# Altium PCB CT310高端控制盒核心板电路V1.3.PcbDoc (part 3 of 10)
Units mil, origin at the board's own origin, x right, y up, seen from the top; angles counter-clockwise.
Board outline 3735.76 x 4625 mil, 2 copper layers (TOP, BOTTOM), stack 10.4 mil thick; 198 components, 362 nets, 1085 pads, 352 vias.
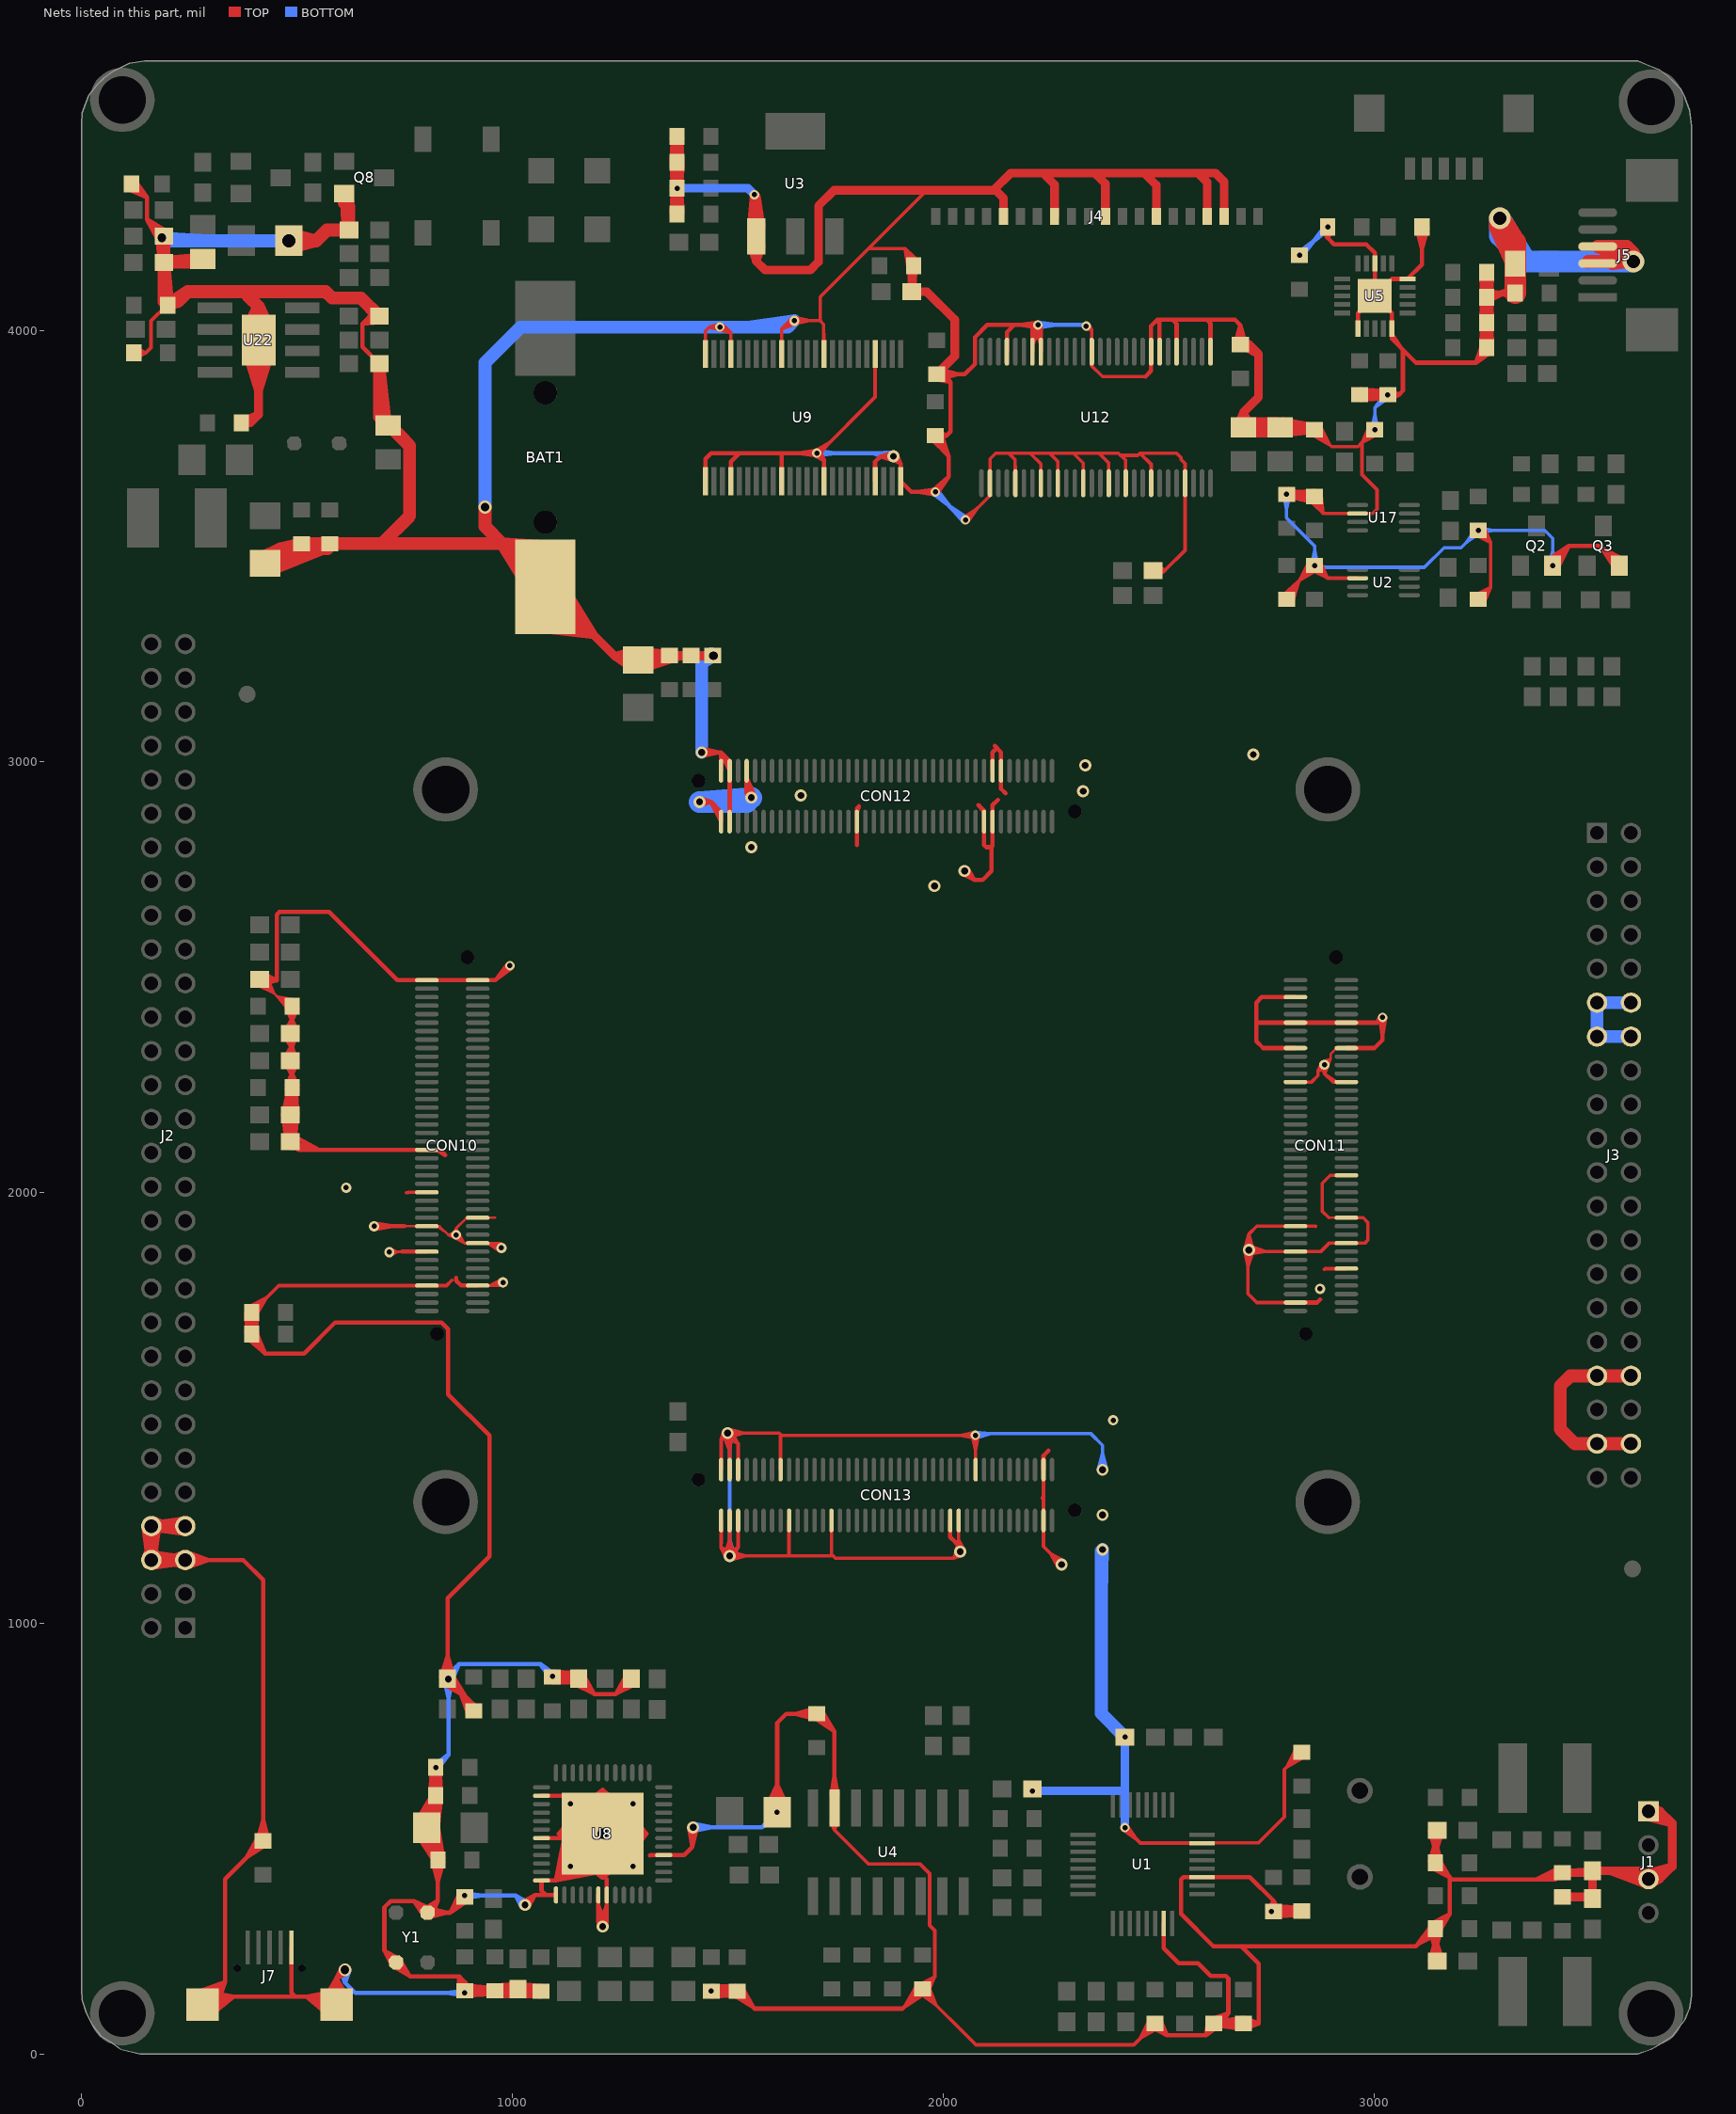
[diagram p3: the nets of this part, all layers, seen from the top]

## Via types
v1: diameter 22, hole 12, TOP to BOTTOM, tented both sides, 177 vias
v2: diameter 22, hole 12, TOP to BOTTOM, 89 vias
v3: diameter 28, hole 16, TOP to BOTTOM, 37 vias
v4: diameter 30, hole 20, TOP to BOTTOM, tented both sides, 26 vias
v5: diameter 24, hole 12, TOP to BOTTOM, 17 vias
v6: diameter 50, hole 30, TOP to BOTTOM, tented both sides, 5 vias
v7: diameter 40, hole 24, TOP to BOTTOM, 1 vias

## Nets (pads, with @x,y where several pads share a name; then routed paths per layer and width w, separated by ;. In a path a pad name is that pad's centre, name@x,y a point inside that pad or via, vN(x,y) a via of type N, cw(c..) or ccw(c..) an arc to the next point about the centre after c; other vN are vias at no path point) (continued)
GND: BAT1.2 C1.2 C2.2 C3.2 C6.1 C7.1 C8.1 C11.2 C13.2 C16.1 C17.2 C18.2 C20.2 C21.2 C22.2 C23.1 C24.2 C25.2 C26.2 C27.2 C28.1 C29.1 C30.2 C31.2 C32.2 C33.2 C34.2 C35.1 C36.2 C37.2 C38.2 C39.2 C40.2 C41.1 C42.1 C43.1 C44.1 C45.1 C46.1 C47.1 C48.1 C49.1 C50.1 C51.1 C52.1 C53.1 C54.1 C55.1 C56.2 C57.2 C58.2 C59.2 C60.2 C61.2 C62.2 C79.2 C80.2 C87.2 C88.2 C89.1 C93.2 C95.2 C96.2 C112.2 C117.2 C118.2 C128.2 C129.2 C130.2 C148.2 C149.2 C150.2 C154.2 CON10.7 CON10.8 CON10.15 CON10.18 CON10.21 CON10.24 CON10.29 CON10.39 CON10.79 CON10.80 CON11.6 CON11.11 CON11.12 CON11.17 CON11.18 CON11.25 CON11.26 CON11.47 CON11.57 CON11.60 CON11.63 CON11.66 CON11.69 CON11.78 CON12.14 CON12.15 CON12.16 CON12.17 CON12.47 CON12.74 CON12.77 CON12.78 CON12.79 CON12.80 CON13.3 CON13.4 CON13.20 CON13.23 CON13.25 CON13.53 CON13.63 CON13.66 CON13.75 CON13.76 CON13.77 CON13.78 CON13.79 CON13.80 D3.2 J1.1 J1.3 J2.5 J2.6 J2.7 J2.8 J3.11 J3.12 J3.13 J3.14 J3.33 J3.34 J3.37 J3.38 J4.3 J4.4 J4.7 J4.10 J4.13 J4.16 J5.3 J5.4 J7.5 J7.6 J7.7 Q2.2 Q3.2 Q8.2 R4.1 R5.1 R11.2 R12.2 R14.1 R15.1 R26.1 R29.1 R32.2 R33.2 R42.1 R43.2 R44.1 R45.2 R89.2 R119.1 R120.1 R128.1 R129.1 R133.2 R135.2 R174.1 U1.3 U1.7 U1.31 U2.2 U3.1 U4.15 U5.6 U5.10 U5.15 U5.18 U5.21 U8.1 U8.6 U8.7 U8.16 U8.38 U8.43 U8.48 U8.49 U9.4 U9.10 U9.15 U9.21 U9.24 U9.25 U9.28 U9.34 U9.39 U9.45 U9.48 U12.2 U12.5 U12.8 U12.10 U12.13 U12.16 U12.18 U12.21 U12.25 U12.29 U12.33 U12.35 U12.36 U12.43 U12.49 U12.50 U12.53 U17.2 U22.9 Y1.2 Y1.4 | length 157005.7
  TOP w6: R174.1@405.35,2480.64 445.59,2461.73 ; R174.1@408.3,2485.94 445.59,2461.73 ; R174.1@411.91,2490.76 445.59,2461.73 ; R174.1@415.15,2494.14 445.59,2461.73 ; R174.1@415.69,2491.63 476.11,2431.21 C87.2@487.98,2431.21 C88.2@487.98,2242.43 ; R174.1@418.73,2497.17 445.59,2461.73 ; R174.1@423.76,2500.47 445.59,2461.73 ; R174.1@429.24,2503.08 445.59,2461.73 ; R119.1@468.23,2310.66 487.98,2343.32 ; R120.1@468.23,2362.98 487.98,2330.32 ; R119.1@469.95,2300.85 487.98,2267.49 ; R120.1@469.95,2372.8 487.98,2406.16 ; C88.2@473.58,2247.43 487.98,2280.11 ; C87.2@473.58,2426.21 487.98,2393.53 ; R119.1@473.68,2307.94 487.98,2343.32 ; R120.1@473.68,2365.71 487.98,2330.32 ; R119.1@475.53,2303.3 487.98,2267.49 ; R120.1@475.53,2370.34 487.98,2406.16 ; C87.2@478.21,2422.18 452.13,2455.2 ; C88.2@479.33,2245.46 487.98,2280.11 ; C87.2@479.33,2428.18 487.98,2393.53 ; R119.1@479.43,2306.13 487.98,2343.32 ; R120.1@479.43,2367.52 487.98,2330.32 ; R119.1@481.36,2304.83 487.98,2267.49 ; R120.1@481.36,2368.82 487.98,2406.16 ; C87.2@482.68,2426.27 452.13,2455.2 ; R119.1@484.05,2305.36 487.98,2343.32 ; R120.1@484.05,2368.29 487.98,2330.32 ; R119.1@486.02,2305.36 487.98,2267.49 ; R120.1@486.02,2368.29 487.98,2406.16 ; C88.2@487.98,2244.4 487.98,2280.11 ; C87.2@487.98,2429.25 487.98,2393.53 ; C87.2@487.98,2433.18 452.13,2455.2 ; R119.1@488.73,2305.16 487.98,2343.32 ; R120.1@488.73,2368.48 487.98,2330.32 ; R119.1@490.7,2305.31 487.98,2267.49 ; R120.1@490.7,2368.33 487.98,2406.16 ; C87.2@491.75,2441.04 452.13,2455.2 ; C87.2@493.37,2446.88 452.13,2455.2 ; R119.1@494.72,2305.75 487.98,2343.32 ; R120.1@494.72,2367.89 487.98,2330.32 ; C88.2@496.64,2245.46 487.98,2280.11 ; R119.1@496.66,2304.4 487.98,2267.49 ; R120.1@496.66,2369.24 487.98,2406.16 ; C87.2@496.64,2428.18 487.98,2393.53 ; R119.1@500.62,2307.3 487.98,2343.32 ; R120.1@500.62,2366.34 487.98,2330.32 ; C88.2@502.38,2247.43 487.98,2280.11 ; C87.2@502.38,2426.21 487.98,2393.53 ; R119.1@502.46,2302.54 487.98,2267.49 ; R120.1@502.46,2371.11 487.98,2406.16 ; v5(713.61,1860.81) 733.61,1860.81 ; v5@715.64,1852.04 733.61,1860.81 ; v5@715.64,1869.57 733.61,1860.81 ; 743.61,1861.83 734.64,1861.83 733.61,1860.81 ; 748.61,1920.57 748.92,1920.88 CON10.21@800.66,1920.88 829.88,1920.88 ; 755.16,1920.88 CON10.21@778.16,1920.88 ; 841.97,1908.79 CON10.21@823.16,1920.88 ; v2@860.89,1902.67 868.61,1915.85 ; v2@863.86,1894.14 887.67,1881.51 ; v2@866.88,1892.76 850.19,1900.57 ; v2@866.88,1908.38 850.19,1900.57 ; v2@875.05,1905.33 887.67,1881.51 ; v2@876.33,1902.67 868.61,1915.85 ; CON10.18@896.27,1881.51 887.67,1881.51 ; CON10.8@918.77,1783.1 976.14,1783.1 977.61,1784.57 v5(977.61,1790.57) CON10.8@946.05,1783.1 ; CON10.8@941.27,1783.1 964.27,1783.1 ; CON10.18@941.27,1881.51 964.27,1881.51 ; CON10.24@941.27,1940.58 955.27,1940.58 CON10.24@918.77,1940.58 893.34,1940.58 868.61,1915.85 ; 955.28,1940.57 958.61,1940.57 ; v5@969.58,1862.53 CON10.18@941.78,1881.51 ; v5@969.69,1862.47 CON10.18@940.7,1881.51 ; v5@974.34,1798.96 CON10.8@946.05,1783.1 ; v5@975.32,1879.41 CON10.18@940.7,1881.51 ; v5@975.38,1879.4 CON10.18@941.78,1881.51 ; v5@978.45,1781.61 CON10.8@946.05,1783.1 ; v5@2878.81,2303.18 2898.02,2309.98 ; v5(2883.61,2295.57) 2898.02,2309.98 ; v5@2891.23,2290.77 2898.02,2309.98 ; CON11.57@2912.02,1940.58 2893.62,1940.58 CON11.57@2934.52,1940.58 ; CON11.17@2912.02,2334.28 2898.02,2320.38 ; CON11.17@2934.52,2334.28 2911.92,2334.28 2898.02,2320.38 ; CON10.21@823.16,1920.88 829.88,1920.88 ; CON10.21@823.16,1920.88 829.88,1920.88 ; 829.88,1920.88 850.19,1900.57 ; 850.19,1900.57 v2(868.61,1900.57) ; v2(868.61,1900.57) 887.67,1881.51 ; v2(868.61,1900.57) 868.61,1915.85 ; 887.67,1881.51 CON10.18@918.77,1881.51 972.67,1881.51 973.61,1880.57 v5(973.61,1870.57) ; CON10.18@940.7,1881.51 v5(973.61,1870.57) ; CON10.18@941.78,1881.51 v5(973.61,1870.57) ; 2898.02,2309.98 2898.02,2320.38
  TOP w8: C96.2@120.82,3947.85 148.61,3947.85 ; C96.2@121.41,3942.17 148.61,3947.85 ; C96.2@121.41,3953.54 148.61,3947.85 ; C96.2@124.2,3934.56 148.61,3947.85 ; C96.2@124.2,3961.15 148.61,3947.85 ; C95.2@208.5,4066.79 C95.2@199.56,4057.85 196.56,4057.85 160.76,4022.06 160.76,3960 148.61,3947.85 ; C117.2@380.54,1718.03 C112.2@389.11,1677.03 ; C117.2@380.65,1720.46 C112.2@381.73,1677.76 ; C112.2@380.71,1674.79 C117.2@394.24,1714.26 ; C117.2@381.09,1714.71 C112.2@399.38,1677.03 ; C117.2@381.94,1712.53 C112.2@406.76,1677.76 ; C117.2@386.36,1733.77 428.93,1755.26 ; C112.2@388.54,1672.93 C117.2@394.24,1714.26 ; C117.2@388.54,1718.91 C112.2@389.11,1677.03 ; C117.2@388.63,1717.52 C112.2@399.38,1677.03 ; C117.2@388.68,1719.91 C112.2@381.73,1677.76 ; C117.2@388.9,1716.57 C112.2@406.76,1677.76 ; C117.2@390.58,1726.93 428.93,1755.26 ; C112.2@394.24,1670.57 C117.2@394.24,1720.57 456.77,1783.1 CON10.7@800.66,1783.1 846.14,1783.1 ; C112.2@394.24,1672.54 C117.2@394.24,1714.26 ; C117.2@394.24,1722.54 428.93,1755.26 ; C117.2@398.41,1718.62 428.93,1755.26 ; C117.2@399.59,1716.57 C112.2@381.73,1677.76 ; C117.2@399.81,1719.91 C112.2@406.76,1677.76 ; C117.2@399.86,1717.52 C112.2@389.11,1677.03 ; C112.2@399.95,1672.93 C117.2@394.24,1714.26 ; C117.2@399.95,1718.91 C112.2@399.38,1677.03 ; C117.2@404.99,1714.02 428.93,1755.26 ; C117.2@406.54,1712.53 C112.2@381.73,1677.76 ; C117.2@407.4,1714.71 C112.2@389.11,1677.03 ; C112.2@407.77,1674.79 C117.2@394.24,1714.26 ; C117.2@407.83,1720.46 C112.2@406.76,1677.76 ; C117.2@407.95,1718.03 C112.2@399.38,1677.03 ; 749.16,1783.1 CON10.7@778.16,1783.1 ; 753.61,1998.94 756.99,1998.94 757.66,1999.62 ; CON10.29@778.16,1999.62 757.66,1999.62 ; CON10.29@800.66,1999.62 757.66,1999.62 ; CON10.7@823.16,1783.1 846.14,1783.1 ; 858.61,1795.57 846.14,1783.1 ; U8.49@1126.97,470.37 1208.61,407.57 ; U8.49@1126.97,550.77 1208.61,613.57 ; U8.49@1132.65,477.13 1208.61,407.57 ; U8.49@1132.65,544.01 1208.61,613.57 ; U8.49@1138.76,483.27 1208.61,407.57 ; U8.49@1138.76,537.88 1208.61,613.57 ; U8.49@1145.26,488.78 1208.61,407.57 ; U8.49@1145.26,532.36 1208.61,613.57 ; U8.49@1152.09,493.67 1208.61,407.57 ; U8.49@1152.09,527.47 1208.61,613.57 ; U8.49@1159.2,497.94 1208.61,407.57 ; U8.49@1159.2,523.2 1208.61,613.57 ; U8.49@1166.56,501.6 1208.61,407.57 ; U8.49@1166.56,519.55 1208.61,613.57 ; U8.49@1168.42,428.93 1105.61,510.57 ; U8.49@1168.42,592.21 1105.61,510.57 ; U8.49@1174.12,504.62 1208.61,407.57 ; U8.49@1174.12,516.52 1208.61,613.57 ; U8.49@1175.17,434.61 1105.61,510.57 ; U8.49@1175.17,586.54 1105.61,510.57 ; U8.49@1181.31,440.72 1105.61,510.57 ; U8.49@1181.31,580.42 1105.61,510.57 ; U8.49@1181.85,507.03 1208.61,407.57 ; U8.49@1181.85,514.11 1208.61,613.57 ; U8.49@1186.82,447.21 1105.61,510.57 ; U8.49@1186.82,573.93 1105.61,510.57 ; U8.49@1189.69,508.82 1208.61,407.57 ; U8.49@1189.69,512.32 1208.61,613.57 ; U8.49@1191.72,454.04 1105.61,510.57 ; U8.49@1191.72,567.1 1105.61,510.57 ; U8.49@1192.62,510.05 U8.49@1198.93,561.75 ; U8.49@1192.62,511.1 U8.49@1198.93,459.39 ; U8.49@1192.88,507.66 U8.49@1208.61,466.57 ; U8.49@1192.88,513.48 U8.49@1208.61,554.57 ; U8.49@1193.54,505.22 U8.49@1218.3,459.39 ; U8.49@1193.54,515.92 U8.49@1218.3,561.75 ; U8.49@1195.99,461.16 1105.61,510.57 ; U8.49@1195.99,559.98 1105.61,510.57 ; U8.49@1199.64,468.52 1105.61,510.57 ; U8.49@1199.64,552.62 1105.61,510.57 ; U8.49@1200.66,509.69 U8.49@1198.93,561.75 ; U8.49@1200.65,509.84 U8.49@1208.61,466.57 ; U8.49@1200.65,511.3 U8.49@1208.61,554.57 ; U8.49@1200.66,511.45 U8.49@1198.93,459.39 ; U8.49@1200.89,508.48 U8.49@1218.3,459.39 ; U8.49@1200.89,512.66 U8.49@1218.3,561.75 ; U8.49@1202.67,476.08 1105.61,510.57 ; U8.49@1202.67,545.06 1105.61,510.57 ; U8.49@1203.26,495.49 U8.49@1157.43,520.25 ; U8.49@1203.26,525.65 U8.49@1157.43,500.89 ; U8.49@1205.08,483.8 1105.61,510.57 ; U8.49@1205.08,537.34 1105.61,510.57 ; U8.49@1205.7,494.84 U8.49@1164.61,510.57 ; U8.49@1205.7,526.3 U8.49@1164.61,510.57 ; U8.49@1206.53,502.85 U8.49@1157.43,520.25 ; U8.49@1206.53,518.29 U8.49@1157.43,500.89 ; U8.49@1206.86,491.65 1105.61,510.57 ; U8.49@1206.86,529.49 1105.61,510.57 ; U8.49@1207.73,502.62 U8.49@1259.8,500.89 ; U8.49@1207.73,518.52 U8.49@1259.8,520.25 ; U8.49@1207.89,502.6 U8.49@1164.61,510.57 ; U8.49@1207.89,518.54 U8.49@1164.61,510.57 ; U8.49@1208.09,494.58 U8.49@1259.8,500.89 ; U8.49@1208.09,526.56 U8.49@1259.8,520.25 ; U8.49@1209.14,494.58 U8.49@1157.43,500.89 ; U8.49@1209.14,526.56 U8.49@1157.43,520.25 ; U8.49@1209.34,502.6 U8.49@1252.61,510.57 ; U8.49@1209.34,518.54 U8.49@1252.61,510.57 ; U8.49@1209.49,502.62 U8.49@1157.43,500.89 ; U8.49@1209.49,518.52 U8.49@1157.43,520.25 ; U8.49@1210.37,491.65 1311.62,510.57 ; U8.49@1210.37,529.49 1311.62,510.57 ; U8.49@1210.7,502.85 U8.49@1259.8,520.25 ; U8.49@1210.7,518.29 U8.49@1259.8,500.89 ; U8.49@1211.52,494.84 U8.49@1252.61,510.57 ; U8.49@1211.52,526.3 U8.49@1252.61,510.57 ; U8.49@1212.15,483.8 1311.62,510.57 ; U8.49@1212.15,537.34 1311.62,510.57 ; U8.49@1213.97,495.49 U8.49@1259.8,520.25 ; U8.49@1213.97,525.65 U8.49@1259.8,500.89 ; U8.49@1214.56,476.08 1311.62,510.57 ; U8.49@1214.56,545.06 1311.62,510.57 ; U8.49@1216.34,508.48 U8.49@1198.93,459.39 ; U8.49@1216.34,512.66 U8.49@1198.93,561.75 ; U8.49@1216.57,509.69 U8.49@1218.3,561.75 ; U8.49@1216.58,509.84 U8.49@1208.61,466.57 ; U8.49@1216.58,511.3 U8.49@1208.61,554.57 ; U8.49@1216.57,511.45 U8.49@1218.3,459.39 ; U8.49@1217.59,468.52 1311.62,510.57 ; U8.49@1217.59,552.62 1311.62,510.57 ; U8.49@1221.24,461.16 1311.62,510.57 ; U8.49@1221.24,559.98 1311.62,510.57 ; U8.49@1223.69,505.22 U8.49@1198.93,459.39 ; U8.49@1223.69,515.92 U8.49@1198.93,561.75 ; U8.49@1224.35,507.66 U8.49@1208.61,466.57 ; U8.49@1224.35,513.48 U8.49@1208.61,554.57 ; U8.49@1224.61,510.05 U8.49@1218.3,561.75 ; U8.49@1224.61,511.1 U8.49@1218.3,459.39 ; U8.49@1225.51,454.04 1311.62,510.57 ; U8.49@1225.51,567.1 1311.62,510.57 ; U8.49@1227.53,508.82 1208.61,407.57 ; U8.49@1227.53,512.32 1208.61,613.57 ; U8.49@1230.4,447.21 1311.62,510.57 ; U8.49@1230.4,573.93 1311.62,510.57 ; U8.49@1235.38,507.03 1208.61,407.57 ; U8.49@1235.38,514.11 1208.61,613.57 ; U8.49@1235.92,440.72 1311.62,510.57 ; U8.49@1235.92,580.42 1311.62,510.57 ; U8.49@1242.06,434.61 1311.62,510.57 ; U8.49@1242.06,586.54 1311.62,510.57 ; U8.49@1243.11,504.62 1208.61,407.57 ; U8.49@1243.11,516.52 1208.61,613.57 ; U8.49@1248.81,428.93 1311.62,510.57 ; U8.49@1248.81,592.21 1311.62,510.57 ; U8.49@1250.67,501.6 1208.61,407.57 ; U8.49@1250.67,519.55 1208.61,613.57 ; U8.49@1258.03,497.94 1208.61,407.57 ; U8.49@1258.03,523.2 1208.61,613.57 ; U8.49@1265.14,493.67 1208.61,407.57 ; U8.49@1265.14,527.47 1208.61,613.57 ; U8.49@1271.97,488.78 1208.61,407.57 ; U8.49@1271.97,532.36 1208.61,613.57 ; U8.49@1278.47,483.27 1208.61,407.57 ; U8.49@1278.47,537.88 1208.61,613.57 ; U8.49@1284.58,477.13 1208.61,407.57 ; U8.49@1284.58,544.01 1208.61,613.57 ; U8.49@1290.25,470.37 1208.61,407.57 ; U8.49@1290.25,550.77 1208.61,613.57 ; U9.24@1447.23,3945.28 1447.23,3998.54 ; U9.24@1447.23,3971.78 1447.23,3998.54 ; v1@1478.44,4001.04 1506.29,3994.96 ; v1@1479.76,4000.71 1456.33,4007.64 ; v1@1479.76,4014.57 1456.33,4007.64 ; 1483.73,1186.31 CON13.79@1483.73,1215.31 ; CON13.79@1483.73,1237.81 1483.73,1185.69 1483.61,1185.57 1483.61,1175.57 ; CON13.80@1483.73,1355.93 1483.73,1425.69 ; CON13.80@1483.73,1378.43 1483.73,1407.43 ; v1@1484.62,4013.48 1506.29,3994.96 ; v3@1488.93,1438.08 1503.42,1401.73 ; v3@1490.07,1445.76 1483.73,1425.69 ; v3@1492.64,1432.55 1523.1,1416.08 ; v3@1493.69,1156.84 1503.42,1193.57 ; v3@1495.4,1149.86 1483.61,1175.57 ; v3@1497.85,1163.74 1523.1,1175.44 ; v3@1499.93,1430.66 1536.61,1440.57 v3@1499.93,1450.48 ; 1503.42,1186.31 CON13.77@1503.42,1215.31 ; CON13.77@1503.42,1237.81 v3@1503.42,1155.76 ; CON13.78@1503.42,1355.93 v3@1503.42,1435.76 ; CON13.78@1503.42,1378.43 1503.42,1407.43 ; v3@1503.8,1432.02 1483.73,1425.69 ; v3@1504.93,1145.66 1541.61,1155.57 v3@1504.93,1165.48 ; U9.21@1506.29,3945.28 1506.29,3994.96 ; U9.21@1506.29,3971.78 1506.29,3994.96 ; v3@1506.63,1446.55 1523.1,1416.08 ; v3@1508.61,1440.52 1503.42,1401.73 ; v3@1509.32,1163.78 1483.61,1175.57 ; v3@1511.9,1149.97 1523.1,1175.44 ; v3@1513.52,1156.94 1503.42,1193.57 ; 1523.1,1186.31 CON13.75@1523.1,1215.31 ; CON13.75@1523.1,1237.81 1523.1,1175.44 ; CON13.76@1523.1,1355.93 1523.1,1416.08 ; CON13.76@1523.1,1378.43 1523.1,1407.43 ; C34.2@1593.61,532.57 C34.2@1593.61,588.57 ; CON13.66@1621.53,1355.93 1621.53,1433.49 1623.61,1435.57 ; CON13.66@1621.53,1378.43 1621.53,1407.43 ; U9.15@1624.4,3945.28 1624.4,4003.43 ; U9.15@1624.4,3971.78 1624.4,4001.78 ; 1641.21,1186.31 CON13.63@1641.21,1215.31 ; CON13.63@1641.21,1237.81 1641.21,1155.57 ; v5@1643.61,4022.64 1624.4,4003.43 ; v5@1648.48,4028.78 1624.4,4003.43 ; v5@1654.5,4014.69 1689.61,4022.64 v5@1654.5,4030.59 ; v5@1657.22,4015.5 1624.4,4003.43 ; v1@1701.76,3720.74 1736.34,3740.58 ; v1@1710.71,3710.05 1736.34,3740.58 ; 1721.52,4001.79 U9.10@1722.82,3971.78 ; U9.10@1722.82,3945.28 1721.52,3946.59 1721.52,4014.24 1713.12,4022.64 ; U4.15@1739.06,537.66 1746.72,519.04 ; 1739.64,1159.54 CON13.53@1739.64,1237.81 ; 1739.64,1186.31 CON13.53@1739.64,1215.31 ; U4.15@1746.72,539.18 1746.72,519.04 ; U4.15@1746.72,570.67 1746.72,519.04 ; U4.15@1754.38,537.66 1746.72,519.04 ; 1840.93,3888.78 U9.4@1840.93,3918.78 ; U9.4@1840.93,3945.28 1840.93,3845.17 1710.76,3715 v1(1705.76,3715) 1736.34,3740.58 ; C150.2@1917.07,4147.79 1910.76,4190 ; C150.2@1924.87,4149.72 1910.76,4190 ; C150.2@1930.13,4150 1930.13,4170.63 ; C150.2@1935.04,4154.9 1910.76,4190 ; C150.2@1941.19,4160.08 1910.76,4190 ; C13.2@1943.34,140.63 1982.45,113.31 ; C13.2@1944.48,161.59 1979.45,179.31 ; C13.2@1948.48,146.81 1982.45,113.31 ; C13.2@1948.84,154.82 1979.45,179.31 ; C13.2@1957.18,147.05 1979.45,179.31 ; C13.2@1957.41,153.92 1982.45,113.31 ; 1960.76,4325 1825.76,4190 ; C13.2@1964.25,143.18 1979.45,179.31 ; C13.2@1964.58,157.54 1982.45,113.31 ; v3@2028.63,1166.07 2034.91,1191.87 ; 2028.61,1185.57 2034.91,1191.87 ; v3@2030.08,1170.78 2023.61,1150.57 ; CON13.23@2034.91,1215.31 2034.91,1191.87 ; CON13.23@2034.91,1237.81 2034.91,1191.87 ; v3@2043.82,1157.03 2023.61,1150.57 ; v1@2046.27,3565.37 2078.73,3587.97 v1@2056.13,3555.51 ; v3@2048.08,1168.81 2034.91,1191.87 ; v1(2050.76,3560) 2107.55,3616.79 U12.2@2107.55,3645.4 2107.55,3701.79 ; v1@2066.66,1434.74 2074.28,1400.56 ; v1@2072.91,1428.61 2038.61,1435.57 v1@2072.91,1442.54 ; CON13.20@2074.28,1355.93 2074.28,1434.91 v1(2073.61,1435.57) ; CON13.20@2074.28,1378.43 2074.28,1407.43 ; v1@2080.59,1435 2074.28,1400.56 ; U12.2@2107.55,3672.56 2107.55,3701.79 ; U12.5@2166.61,3645.4 2165.76,3646.24 2165.76,3700 ; U12.5@2166.61,3672.56 2165.76,3700 ; U12.8@2225.66,3645.4 2225.66,3690.1 ; U12.8@2225.66,3672.56 2225.66,3690.1 ; 2228.61,1290.57 2231.76,1287.43 ; 2231.76,1186.31 CON13.3@2231.76,1215.31 ; CON13.3@2231.76,1260.31 2231.76,1287.43 ; 2231.76,1304.43 CON13.4@2231.76,1333.43 ; CON13.4@2231.76,1355.93 2231.76,1287.43 ; U12.10@2265.03,3645.4 2265.03,3695.73 ; U12.10@2265.03,3672.56 2265.03,3695.73 ; v3@2265.61,1129.57 2248.61,1160.57 ; v3@2279.61,1143.57 2248.61,1160.57 ; U12.13@2324.09,3645.4 2324.09,3691.67 ; U12.13@2324.09,3672.56 2324.09,3691.67 ; v1@2328.14,4003.51 2343.77,4000.97 ; v1(2330.76,4010) 2343.77,4000.97 ; v1@2332.75,4011.99 2343.77,4000.97 ; v1@2335.92,4014.73 2343.77,4000.97 ; U12.43@2343.77,3977.68 2343.77,4000.97 ; U12.16@2383.14,3645.4 2383.14,3692.62 ; U12.16@2383.14,3672.56 2383.14,3692.62 ; v1@2416.27,519.63 2448.73,497.03 v1@2426.13,529.49 ; v1(2420.76,525) 2456.55,489.21 U1.7@2599.36,489.21 2600.15,490 2730.76,490 2790.76,550 2790.76,660 C23.1@2830.76,700 ; U12.18@2422.51,3645.4 2422.51,3698.25 ; U12.18@2422.51,3672.56 2422.51,3698.25 ; 2468.61,3892.64 2368.61,3892.64 2343.77,3917.49 ; C16.1@2477.56,78.51 2456.07,35.94 ; U12.21@2481.57,3645.4 2481.57,3689.19 ; U12.21@2481.57,3672.56 2481.57,3689.19 ; C16.1@2484.41,74.3 2456.07,35.94 ; R89.2@2486.19,3442.85 2513.61,3442.85 ; R89.2@2488.16,3442.85 2513.61,3442.85 ; C16.1@2488.79,70.63 2456.07,35.94 ; R89.2@2489.32,3435.26 2513.61,3442.85 ; R89.2@2489.32,3450.45 2513.61,3442.85 ; C16.1@2490.76,70.63 2441.13,21 2074.76,21 1950.76,145 C13.2@1950.76,150.63 1979.45,179.31 ; C16.1@2492.71,66.47 2456.07,35.94 ; R89.2@2492.99,3427.93 2513.61,3442.85 ; R89.2@2492.99,3457.78 2513.61,3442.85 ; C16.1@2497.31,59.88 2456.07,35.94 ; 2545.83,489.21 U1.7@2574.76,489.21 ; 2560.31,3588.92 U12.25@2560.31,3618.23 ; U12.25@2560.31,3672.56 2560.31,3690.96 ; U1.7@2623.97,489.21 2652.9,490 ; C8.1@2629.11,76.34 2672.13,75.63 ; C8.1@2629.99,84.33 2672.13,75.63 ; C8.1@2630.43,65.01 2672.13,75.63 ; C8.1@2633.14,57.43 2672.13,75.63 ; C8.1@2641.39,75.63 C7.1@2695.76,75.63 ; C7.1@2688.71,57.89 2652.59,79.67 ; C7.1@2689.83,83.76 C8.1@2645.59,63.24 ; C7.1@2689.86,57.49 2652.1,75.96 ; C7.1@2689.98,57.45 2651.82,75.63 ; C7.1@2691.31,84.12 C8.1@2643.64,68.37 ; C7.1@2692.19,65.14 2652.59,79.67 ; C7.1@2692.33,56.99 C8.1@2629.39,70.63 ; C7.1@2692.33,84.27 C8.1@2629.39,70.63 ; C7.1@2692.53,56.97 C8.1@2643.64,68.37 ; C7.1@2692.6,76.22 C8.1@2645.59,63.24 ; C7.1@2692.68,65.02 2652.1,75.96 ; C7.1@2692.73,65.01 2651.82,75.63 ; C7.1@2693.18,84.33 2651.82,75.63 ; C7.1@2693.21,76.32 C8.1@2643.64,68.37 ; C7.1@2693.29,84.34 2652.1,75.96 ; C7.1@2693.54,64.92 C8.1@2629.39,70.63 ; C7.1@2693.54,76.34 C8.1@2629.39,70.63 ; C7.1@2693.72,64.91 C8.1@2643.64,68.37 ; C7.1@2693.94,56.91 C8.1@2645.59,63.24 ; C7.1@2694.08,76.34 2651.82,75.63 ; C7.1@2694.13,76.34 2652.1,75.96 ; C7.1@2694.32,64.94 C8.1@2645.59,63.24 ; C7.1@2694.51,84.33 2652.59,79.67 ; C7.1@2694.63,76.28 2652.59,79.67 ; v3@2698.63,1865.08 2705.76,1827.38 ; v3@2698.7,1866.99 2708.61,1902.85 ; v3@2708.92,1855.65 2747.14,1861.83 ; v3@2710.88,1875.39 2747.14,1861.83 ; v3@2718.4,1863.61 2705.76,1827.38 ; v3@2718.52,1866.99 2708.61,1902.85 ; 2764.9,1743.72 CON11.78@2793.9,1743.72 ; 2764.9,1861.83 CON11.66@2793.9,1861.83 ; 2764.9,1920.88 CON11.60@2793.9,1920.88 ; C40.2@2787.21,3384.43 2823.45,3417.06 ; C57.2@2789.72,3616.47 C57.2@2799.98,3605.84 ; C57.2@2789.89,3623.82 C57.2@2799.98,3632.9 ; C40.2@2793.06,3378.92 2823.45,3417.06 ; C57.2@2793.87,3613.26 2830.47,3606.63 ; C57.2@2794.69,3613.08 2831.68,3610.9 ; C57.2@2795.3,3613.02 2832.29,3614.07 ; C40.2@2795.76,3375.63 2795.76,3389.37 v1(2860.76,3454.37) ; C57.2@2795.76,3619.37 2855.76,3619.37 C80.2@2860.76,3614.37 ; C57.2@2795.92,3613 2832.67,3617.34 ; C57.2@2796.03,3626.99 2832.76,3622.07 ; C57.2@2796.12,3613.01 2832.41,3618.4 ; C57.2@2796.36,3626.97 2831.9,3620.41 ; C57.2@2796.52,3613.04 2831.9,3620.41 ; C57.2@2796.73,3626.93 2832.41,3618.4 ; C57.2@2796.81,3613.08 2832.76,3622.07 ; C57.2@2796.92,3626.9 2832.67,3617.34 ; C57.2@2797.53,3626.77 2832.29,3614.07 ; C40.2@2797.73,3375.63 2823.45,3417.06 ; C57.2@2797.73,3619.37 2839.44,3619.37 ; C57.2@2798.12,3613.67 2839.44,3619.37 ; C57.2@2798.12,3625.07 2839.44,3619.37 ; C57.2@2798.11,3626.59 2831.68,3610.9 ; C57.2@2798.88,3626.27 2830.47,3606.63 ; C40.2@2802.75,3372.9 2823.45,3417.06 ; C57.2@2802.75,3619.61 C57.2@2799.98,3632.9 ; C57.2@2802.75,3620.35 C57.2@2799.98,3605.84 ; C40.2@2810.28,3370.11 2823.45,3417.06 ; CON11.78@2816.4,1743.72 2727.03,1743.72 2705.76,1765 2705.76,1862.79 v3(2708.61,1865.65) ; CON11.26@2816.4,2255.54 2853.88,2255.54 ; C23.1@2817.56,707.88 2796.07,665.31 ; C23.1@2824.41,703.67 2796.07,665.31 ; C23.1@2828.79,700 2796.07,665.31 ; C23.1@2832.71,695.84 2796.07,665.31 ; C23.1@2837.31,689.25 2796.07,665.31 ; CON11.66@2838.9,1861.83 2867.9,1861.83 ; CON11.60@2838.9,1920.88 2863.3,1920.88 ; CON11.26@2838.9,2255.54 2853.88,2255.54 ; C24.2@2847.56,3462.25 2826.07,3419.68 ; C80.2@2851.33,3606.74 2880.92,3574.84 ; C80.2@2852.76,3602.05 2817.84,3626.78 ; C24.2@2853.95,3455.99 C24.2@2854.54,3443.37 ; C80.2@2854.02,3601.51 2817.46,3622.4 ; C149.2@2854.21,3758.62 2895.45,3734.68 ; C24.2@2854.41,3458.04 2826.07,3419.68 ; C80.2@2854.98,3601.19 2816.78,3619.37 ; C80.2@2854.99,3601.19 2816.67,3619.37 ; C24.2@2855.24,3458.67 2831.93,3423.08 ; C24.2@2855.31,3458.76 2833.02,3425.47 ; C24.2@2855.39,3458.86 2832.79,3426.4 ; C24.2@2855.42,3458.9 2832.56,3426.56 ; C80.2@2855.51,3627.69 C57.2@2811.52,3609.79 ; C24.2@2855.54,3459.04 2831,3426.36 ; C24.2@2856.33,3448.95 2888.93,3426.83 ; C80.2@2856.77,3609.02 2817.84,3626.78 ; C80.2@2857.08,3627.98 C57.2@2798.3,3613.69 ; C80.2@2857.32,3608.85 2817.46,3622.4 ; C80.2@2857.39,3600.73 C57.2@2798.3,3613.69 ; C80.2@2857.73,3608.75 2816.78,3619.37 ; C80.2@2857.7,3611.64 2880.92,3574.84 ; C80.2@2857.74,3608.75 2816.67,3619.37 ; C80.2@2857.9,3620.02 C57.2@2811.52,3609.79 ; C80.2@2858.13,3600.67 C57.2@2811.52,3609.79 ; C80.2@2858.46,3620.08 C57.2@2798.3,3613.69 ; C80.2@2858.59,3608.66 C57.2@2798.3,3613.69 ; C24.2@2858.79,3454.37 2826.07,3419.68 ; C149.2@2858.81,3765.21 2895.45,3734.68 ; C24.2@2858.88,3450.14 2890.92,3424.84 ; C80.2@2859,3608.66 C57.2@2811.52,3609.79 ; C80.2@2859.18,3628.08 2817.46,3622.4 ; C80.2@2859.5,3620.04 2817.46,3622.4 ; C80.2@2860.08,3619.94 2817.84,3626.78 ; C80.2@2860.61,3627.97 2817.84,3626.78 ; C149.2@2860.76,3769.37 2900.13,3730 2961.39,3730 2970.76,3739.37 ; C24.2@2862.71,3450.21 2826.07,3419.68 ; C24.2@2862.73,3454.37 2890.92,3424.84 ; C80.2@2862.73,3614.37 2880.92,3574.84 ; C149.2@2862.73,3769.37 2895.45,3734.68 ; 2863.61,1920.57 2863.3,1920.88 ; C24.2@2865.1,3448.88 2831,3426.36 ; C24.2@2865.22,3448.97 2832.56,3426.56 ; C24.2@2865.25,3449 2832.79,3426.4 ; C24.2@2865.37,3449.1 2833.02,3425.47 ; C24.2@2865.5,3449.22 2831.93,3423.08 ; C24.2@2865.66,3449.37 C24.2@2854.54,3443.37 ; C24.2@2866.08,3458.92 2888.93,3426.83 ; C24.2@2866.11,3458.89 2889.05,3426.31 ; C24.2@2867.13,3458.02 2890.92,3424.84 ; C149.2@2867.11,3773.04 2895.45,3734.68 ; C24.2@2867.31,3443.62 2826.07,3419.68 ; C80.2@2868.07,3616.41 2880.92,3574.84 ; C149.2@2873.96,3777.25 2895.45,3734.68 ; C24.2@2874.1,3462.04 2890.92,3424.84 ; v5@2875.78,2293.97 2883.61,2275.61 ; C80.2@2875.94,3618.07 2880.92,3574.84 ; v5@2876.98,2300.05 2868.76,2280.72 ; 2883.61,1820.57 2885.51,1822.47 ; 2887.57,2271.65 CON11.25@2912.02,2255.54 ; v5@2888.09,2288.94 2868.76,2280.72 ; v5@2891.45,2293.97 2883.61,2275.61 ; 2893.62,1940.58 2878.61,1955.58 2878.61,2020.58 2897.02,2038.99 ; CON11.69@2912.02,1822.47 2885.51,1822.47 ; CON11.63@2912.02,1881.51 2894.55,1881.51 ; CON11.47@2912.02,2038.99 2897.02,2038.99 ; 2912.11,3424.84 U2.2@2941.04,3424.84 ; 2912.11,3574.84 U17.2@2941.04,3574.84 ; CON11.69@2934.52,1822.47 2885.51,1822.47 ; CON11.57@2934.52,1940.58 2973.61,1940.58 ; CON11.47@2934.52,2038.99 2897.02,2038.99 ; CON11.25@2934.52,2255.54 2903.68,2255.54 ; CON11.63@2957.02,1881.51 2977.27,1881.51 ; CON11.57@2957.02,1940.58 2973.61,1940.58 ; U2.2@2960.72,3424.84 2890.92,3424.84 ; U17.2@2980.41,3574.84 2995.6,3574.84 ; C148.2@2987.35,3776.93 2970.76,3739.37 ; C148.2@2994.35,3772.97 2970.76,3739.37 ; C148.2@2995.37,3773.83 2972.66,3740.91 ; C148.2@2995.39,3773.86 2972.79,3741.4 3005.25,3764 2972.69,3741.43 ; C148.2@2995.44,3773.92 2971.77,3740.8 ; C148.2@2998.79,3769.37 2970.76,3739.37 ; C148.2@3002.69,3765.19 2970.76,3739.37 ; C148.2@3005.23,3763.98 2971.77,3740.8 ; C148.2@3007.11,3758.46 2970.76,3739.37 ; C79.2@3234.48,3524.67 3269.45,3506.94 ; C25.2@3234.63,3386.7 3269.45,3403.69 ; C79.2@3238.84,3531.44 3269.45,3506.94 ; C25.2@3238.89,3379.87 3269.45,3403.69 ; C25.2@3240.76,3375.63 3241.39,3375.63 3269.45,3403.69 ; C25.2@3242.73,3375.63 3269.45,3403.69 ; C79.2@3242.73,3535.63 3269.45,3506.94 ; C25.2@3247.15,3372 3269.45,3403.69 ; C79.2@3247.18,3539.21 3269.45,3506.94 ; C25.2@3254.18,3368.08 3269.45,3403.69 ; C79.2@3254.25,3543.08 3269.45,3506.94 ; C55.1@3259.45,4084.31 3303.3,4086.67 ; C55.1@3259.76,4092.35 3303.3,4086.67 ; C55.1@3260.13,4078.64 3303.3,4086.67 ; C55.1@3260.13,4086.67 C49.1@3326.39,4086.67 ; C55.1@3261.54,4073.1 3303.3,4086.67 ; C55.1@3264.71,4065.71 3303.3,4086.67 ; C49.1@3324.13,4073.14 3284.67,4086.67 ; C49.1@3324.13,4100.2 3284.67,4086.67 ; C49.1@3326,4080.96 3284.67,4086.67 ; C49.1@3326,4092.37 3284.67,4086.67 ; C112.2@381.73,1677.76 C117.2@394.24,1718.6 ; C112.2@389.11,1677.03 C117.2@394.24,1718.6 ; C112.2@394.24,1676.89 C117.2@394.24,1718.6 ; C112.2@394.24,1676.89 388.54,1718.21 C112.2@394.24,1676.89 ; C112.2@394.24,1676.89 399.95,1718.21 C112.2@394.24,1676.89 ; C112.2@394.24,1676.89 380.71,1716.35 C112.2@394.24,1676.89 ; C112.2@394.24,1676.89 407.77,1716.35 C112.2@394.24,1676.89 ; C112.2@394.24,1676.89 C117.2@394.24,1718.6 ; C117.2@394.24,1718.6 C112.2@399.38,1677.03 ; C117.2@394.24,1718.6 C112.2@406.76,1677.76 ; 1105.61,510.57 v7(1208.61,510.57) ; U8.49@1157.43,500.89 v7(1208.61,510.57) ; U8.49@1157.43,520.25 v7(1208.61,510.57) ; U8.49@1164.61,510.57 v7(1208.61,510.57) ; U8.49@1198.93,459.39 v7(1208.61,510.57) ; U8.49@1198.93,561.75 v7(1208.61,510.57) ; 1208.61,407.57 v7(1208.61,510.57) ; U8.49@1208.61,466.57 v7(1208.61,510.57) ; v7(1208.61,510.57) U8.49@1259.8,520.25 ; v7(1208.61,510.57) U8.49@1259.8,500.89 ; v7(1208.61,510.57) U8.49@1218.3,561.75 ; v7(1208.61,510.57) U8.49@1218.3,459.39 ; v7(1208.61,510.57) 1311.62,510.57 ; v7(1208.61,510.57) 1208.61,613.57 ; 1447.23,3998.54 1456.33,4007.64 ; 1456.33,4007.64 v1(1480.76,4007.64) ; v1(1480.76,4007.64) 1493.61,4007.64 ; v1(1480.76,4007.64) 1506.29,3994.96 ; v1(1480.76,4007.64) 1493.61,4007.64 ; 1483.61,1175.57 v3(1503.61,1155.57) ; 1483.61,1175.57 v3@1503.42,1155.76 ; 1483.73,1425.69 v3(1498.61,1440.57) ; 1493.61,4007.64 1482.67,4000.91 1493.61,4007.64 ; 1493.61,4007.64 1482.67,4014.38 1493.61,4007.64 ; 1493.61,4007.64 1506.29,3994.96 ; v3(1498.61,1440.57) 1523.1,1416.08 ; v3(1498.61,1440.57) 1503.42,1401.73 ; v3(1498.61,1440.57) v3@1503.42,1435.76 ; v3(1498.61,1440.57) 1618.61,1440.57 1623.61,1435.57 ; v3@1503.42,1155.76 1523.1,1175.44 ; 1503.42,1193.57 v3(1503.61,1155.57) ; v3@1503.42,1435.76 1523.1,1416.08 ; v3(1503.61,1155.57) 1523.1,1175.44 ; v3(1503.61,1155.57) 1641.21,1155.57 ; 1623.61,1435.57 v1(2073.61,1435.57) ; 1624.4,4003.43 v5(1653.61,4022.64) 1713.12,4022.64 ; 1641.21,1155.57 1743.61,1155.57 1748.61,1150.57 2023.61,1150.57 ; 1713.12,4022.64 1713.4,4022.64 1713.4,4077.64 1825.76,4190 ; 1746.72,519.04 1824.76,441 1944.78,441 1967.53,418.26 1967.53,298.23 1979.45,286.31 1979.45,179.31 ; 1825.76,4190 1910.76,4190 ; 1910.76,4190 C150.2@1930.13,4151.97 ; 1910.76,4190 1930.13,4170.63 ; C150.2@1930.13,4151.97 1930.13,4170.63 ; C150.2@1930.13,4151.97 1930.13,4170.63 ; 1930.13,4170.63 1935.78,4152.84 1930.13,4170.63 ; 1930.13,4170.63 1924.48,4152.84 1930.13,4170.63 ; 1930.13,4170.63 1942.89,4157.01 1930.13,4170.63 ; 1930.13,4170.63 1917.37,4157.01 1930.13,4170.63 ; 1979.45,179.31 1952.73,150.63 1982.45,113.31 ; 2023.61,1150.57 v3(2038.61,1165.57) ; 2034.91,1191.87 v3(2038.61,1165.57) ; 2034.91,1191.87 2034.91,1169.28 v3(2038.61,1165.57) ; v1(2073.61,1435.57) 2074.28,1400.56 ; 2107.55,3701.79 2120.76,3715 2150.76,3715 ; 2150.76,3715 2165.76,3700 ; 2150.76,3715 2200.76,3715 ; 2200.76,3715 2225.66,3690.1 ; 2200.76,3715 2245.76,3715 ; 2231.76,1287.43 CON13.3@2231.76,1237.81 2231.76,1177.63 2248.61,1160.77 2248.61,1160.57 ; 2245.76,3715 2300.76,3715 ; 2245.76,3715 2265.03,3695.73 ; 2248.61,1160.57 v3(2273.61,1135.57) 2248.61,1160.57 ; 2300.76,3715 2324.09,3691.67 ; 2300.76,3715 2360.76,3715 ; 2343.77,3917.49 2343.77,3923.35 2343.77,3917.49 ; 2343.77,3917.49 U12.43@2343.77,3950.52 2343.77,4000.97 ; 2360.76,3715 2383.14,3692.62 ; 2360.76,3715 2405.76,3715 ; 2405.76,3715 2422.51,3698.25 ; 2405.76,3715 2410.76,3710 2450.76,3710 2455.76,3715 ; 2455.76,3715 2481.57,3689.19 ; 2455.76,3715 2540.76,3715 2550.76,3705 2550.76,3700.5 2560.31,3690.96 ; 2513.61,3442.85 2560.31,3489.55 U12.25@2560.31,3645.4 2560.31,3690.96 ; C8.1@2629.39,70.63 C7.1@2693.79,70.63 ; C8.1@2629.39,70.63 2672.13,75.63 ; C8.1@2643.64,68.37 C7.1@2693.79,70.63 ; C8.1@2645.59,63.24 C7.1@2693.79,70.63 ; 2651.82,75.63 C7.1@2693.79,70.63 ; 2652.1,75.96 C7.1@2693.79,70.63 ; 2652.59,79.67 C7.1@2693.79,70.63 ; 2672.13,75.63 C7.1@2693.79,70.63 ; 2672.13,75.63 C7.1@2694.35,76.32 ; 2672.13,75.63 C7.1@2691.8,65.27 ; 2672.13,75.63 C7.1@2692.6,84.29 ; 2672.13,75.63 C7.1@2686.73,58.87 ; 2672.13,75.63 C7.1@2693.79,70.63 ; 2672.13,75.63 C7.1@2694.35,76.32 ; 2672.13,75.63 C7.1@2691.8,65.27 ; 2672.13,75.63 C7.1@2692.6,84.29 ; 2672.13,75.63 C7.1@2686.73,58.87 ; 2672.13,75.63 C7.1@2693.79,70.63 ; 2672.13,75.63 C7.1@2694.35,76.32 ; 2672.13,75.63 C7.1@2691.8,65.27 ; 2672.13,75.63 C7.1@2692.6,84.29 ; 2672.13,75.63 C7.1@2686.73,58.87 ; 2672.13,75.63 C7.1@2693.79,70.63 ; 2672.13,75.63 C7.1@2694.35,76.32 ; 2672.13,75.63 C7.1@2691.8,65.27 ; 2672.13,75.63 C7.1@2692.6,84.29 ; 2672.13,75.63 C7.1@2686.73,58.87 ; 2672.13,75.63 C7.1@2693.79,70.63 ; 2672.13,75.63 C7.1@2694.35,76.32 ; 2672.13,75.63 C7.1@2691.8,65.27 ; 2672.13,75.63 C7.1@2692.6,84.29 ; 2672.13,75.63 C7.1@2686.73,58.87 ; 2705.76,1827.38 v3(2708.61,1865.65) ; v3(2708.61,1865.65) 2747.14,1861.83 ; v3(2708.61,1865.65) 2712.42,1861.83 CON11.66@2816.4,1861.83 2874.88,1861.83 2894.55,1881.51 ; v3(2708.61,1865.65) 2708.61,1902.85 ; 2708.61,1902.85 2726.64,1920.88 CON11.60@2816.4,1920.88 2863.3,1920.88 ; v1(2795.76,3620) 2832.29,3614.07 ; v1(2795.76,3620) 2832.67,3617.34 ; v1(2795.76,3620) 2831.68,3610.9 ; v1(2795.76,3620) 2832.76,3622.07 ; v1(2795.76,3620) 2830.47,3606.63 ; v1(2795.76,3620) 2830.77,3619.37 ; v1(2795.76,3620) 2832.41,3618.4 ; v1(2795.76,3620) 2831.9,3620.41 ; v1(2795.76,3620) C57.2@2799.98,3605.84 ; v1(2795.76,3620) 2839.44,3619.37 ; v1(2795.76,3620) C57.2@2799.98,3632.9 ; v1(2795.76,3620) 2839.44,3619.37 ; v1(2795.76,3620) 2830.77,3619.37 ; C57.2@2798.3,3613.69 C80.2@2858.79,3614.37 ; C57.2@2799.98,3605.84 2839.44,3619.37 ; C57.2@2799.98,3632.9 2839.44,3619.37 ; C57.2@2811.52,3609.79 C80.2@2858.79,3614.37 ; 2816.67,3619.37 C80.2@2858.79,3614.37 ; 2816.67,3619.37 2859.08,3620.08 2816.78,3619.37 ; 2816.67,3619.37 2858.18,3628.07 2816.78,3619.37 ; 2816.78,3619.37 C80.2@2858.79,3614.37 ; 2817.46,3622.4 C80.2@2858.79,3614.37 ; 2817.84,3626.78 C80.2@2858.79,3614.37 ; 2830.77,3619.37 2796.33,3613.02 2830.77,3619.37 ; 2830.77,3619.37 2796.58,3626.95 2830.77,3619.37 ; 2831,3426.36 v1(2860.76,3454.37) ; 2831.93,3423.08 v1(2860.76,3454.37) ; 2832.56,3426.56 v1(2860.76,3454.37) ; 2832.79,3426.4 v1(2860.76,3454.37) ; 2833.02,3425.47 v1(2860.76,3454.37) ; 2839.44,3619.37 2796.22,3613.02 2839.44,3619.37 ; 2839.44,3619.37 2796.42,3626.97 2839.44,3619.37 ; 2839.44,3619.37 C80.2@2858.79,3614.37 ; 2839.44,3619.37 C80.2@2859.42,3620.05 ; 2839.44,3619.37 C80.2@2856.58,3609.1 ; 2839.44,3619.37 C80.2@2857.46,3628.02 ; 2839.44,3619.37 C80.2@2851.01,3603.07 ; 2839.44,3619.37 C80.2@2858.79,3614.37 ; 2839.44,3619.37 C80.2@2859.42,3620.05 ; 2839.44,3619.37 C80.2@2856.58,3609.1 ; 2839.44,3619.37 C80.2@2857.46,3628.02 ; 2839.44,3619.37 C80.2@2851.01,3603.07 ; 2839.44,3619.37 C80.2@2858.79,3614.37 ; 2839.44,3619.37 C80.2@2859.42,3620.05 ; 2839.44,3619.37 C80.2@2856.58,3609.1 ; 2839.44,3619.37 C80.2@2857.46,3628.02 ; 2839.44,3619.37 C80.2@2851.01,3603.07 ; 2839.44,3619.37 C80.2@2858.79,3614.37 ; 2839.44,3619.37 C80.2@2859.42,3620.05 ; 2839.44,3619.37 C80.2@2856.58,3609.1 ; 2839.44,3619.37 C80.2@2857.46,3628.02 ; 2839.44,3619.37 C80.2@2851.01,3603.07 ; 2839.44,3619.37 C80.2@2858.79,3614.37 ; 2839.44,3619.37 C80.2@2859.42,3620.05 ; 2839.44,3619.37 C80.2@2856.58,3609.1 ; 2839.44,3619.37 C80.2@2857.46,3628.02 ; 2839.44,3619.37 C80.2@2851.01,3603.07 ; 2853.88,2255.54 2868.76,2270.42 2868.76,2280.72 ; C24.2@2854.54,3443.37 v1(2860.76,3454.37) ; C24.2@2854.54,3443.37 2890.92,3424.84 ; v1(2860.76,3454.37) 2889.01,3426.84 ; v1(2860.76,3454.37) 2889.05,3426.31 ; v1(2860.76,3454.37) 2889.94,3426.21 ; v1(2860.76,3454.37) 2890.67,3424.96 ; v1(2860.76,3454.37) 2888.93,3426.83 ; v1(2860.76,3454.37) 2861.39,3454.37 2890.92,3424.84 ; 2860.76,3595 C80.2@2860.76,3614.37 ; 2860.76,3595 2855.11,3613.53 2860.76,3595 ; 2860.76,3595 2866.41,3613.53 2860.76,3595 ; 2860.76,3595 2847.93,3609.51 2860.76,3595 ; 2860.76,3595 2873.59,3609.51 2860.76,3595 ; 2860.76,3595 2880.92,3574.84 ; 2860.76,3595 C80.2@2860.76,3614.37 ; C24.2@2866.07,3458.93 2889.01,3426.84 ; C24.2@2866.04,3458.97 2889.94,3426.21 ; C24.2@2866.07,3458.94 2890.67,3424.96 ; 2868.76,2280.72 v5(2883.61,2295.57) ; 2868.76,2280.72 v5(2883.61,2295.57) ; 2880.92,3574.84 U17.2@2960.72,3574.84 2995.6,3574.84 ; 2883.61,2275.61 v5(2883.61,2295.57) ; 2883.61,2275.61 2903.68,2255.54 ; 2883.61,2275.61 v5(2883.61,2295.57) ; 2889.01,3426.84 2856.34,3448.94 2889.94,3426.21 ; 2889.05,3426.31 2856.29,3448.99 2890.67,3424.96 ; 2894.55,1881.51 CON11.63@2934.52,1881.51 2977.27,1881.51 ; 2903.68,2255.54 CON11.25@2912.02,2255.54 ; 2903.68,2255.54 CON11.25@2912.02,2255.54 ; 2970.76,3739.37 2970.76,3665 3005.76,3630 3005.76,3585 2995.6,3574.84 ; 2970.76,3739.37 v1(3000.76,3769.37) ; 2971.06,3739.53 v1(3000.76,3769.37) ; 2971.06,3739.53 2995.41,3773.88 2972.69,3741.43 ; 2971.06,3739.53 3005.29,3764.04 2972.66,3740.91 ; 2971.77,3740.8 v1(3000.76,3769.37) ; 2972.66,3740.91 v1(3000.76,3769.37) ; 2972.69,3741.43 v1(3000.76,3769.37) ; 2973.61,1940.58 2984.18,1930 2984.18,1888.42 2977.27,1881.51 ; C79.2@3236.26,3530.27 3269.45,3506.94 ; C79.2@3236.27,3530.26 3268.79,3507.65 ; C79.2@3236.25,3530.27 3268.98,3507.32 ; C79.2@3236.26,3530.27 3269.45,3506.94 ; C79.2@3236.27,3530.26 3268.73,3507.66 3246.13,3540.12 3268.98,3507.32 ; v1(3240.76,3535.63) 3269.45,3506.94 ; v1(3240.76,3535.63) 3268.79,3507.65 ; v1(3240.76,3535.63) 3268.98,3507.32 ; v1(3240.76,3535.63) 3269.45,3506.94 ; v1(3240.76,3535.63) 3269.45,3506.94 ; C79.2@3246.12,3540.13 3269.45,3506.94 ; C79.2@3246.12,3540.13 3268.79,3507.65 ; C79.2@3246.12,3540.13 3269.45,3506.94 ; 3269.45,3403.69 3269.45,3506.94

## Text inside footprints (layer, text, board x,y; h text height)
CON11: PIN_NUMBER "54" at 2696.4,1979.94 h25 r270; PIN_NUMBER "5" at 3024.52,2452.38 h25 r270; PIN_NUMBER "55" at 3014.52,1960.25 h25 r270; PIN_NUMBER "1" at 3024.52,2491.75 h25 r270; PIN_NUMBER "2" at 2706.4,2491.75 h25 r270; PIN_NUMBER "53" at 3014.52,1979.94 h25 r270; PIN_NUMBER "41" at 3014.52,2098.06 h25 r270; PIN_NUMBER "48" at 2696.4,2038.99 h25 r270; PIN_NUMBER "56" at 2696.4,1960.25 h25 r270; PIN_NUMBER "62" at 2696.4,1901.21 h25 r270; PIN_NUMBER "65" at 3014.52,1861.83 h25 r270; PIN_NUMBER "52" at 2696.4,1999.62 h25 r270; PIN_NUMBER "45" at 3014.52,2058.69 h25 r270; PIN_NUMBER "67" at 3014.52,1842.15 h25 r270; PIN_NUMBER "61" at 3014.52,1901.21 h25 r270; PIN_NUMBER "59" at 3014.52,1920.88 h25 r270; PIN_NUMBER "77" at 3014.52,1743.72 h25 r270; PIN_NUMBER "43" at 3014.52,2078.36 h25 r270; PIN_NUMBER "64" at 2696.4,1881.51 h25 r270; PIN_NUMBER "75" at 3014.52,1763.41 h25 r270; PIN_NUMBER "58" at 2696.4,1940.58 h25 r270; PIN_NUMBER "79" at 3014.52,1724.04 h25 r270; PIN_NUMBER "80" at 2696.4,1724.04 h25 r270; PIN_NUMBER "22" at 2696.4,2294.91 h25 r270; PIN_NUMBER "21" at 3014.52,2294.91 h25 r270; PIN_NUMBER "50" at 2696.4,2019.31 h25 r270; PIN_NUMBER "23" at 3014.52,2275.21 h25 r270; PIN_NUMBER "70" at 2696.4,1822.47 h25 r270; PIN_NUMBER "27" at 3014.52,2235.84 h25 r270; PIN_NUMBER "76" at 2696.4,1763.41 h25 r270; PIN_NUMBER "42" at 2696.4,2098.06 h25 r270; PIN_NUMBER "73" at 3014.52,1783.1 h25 r270; PIN_NUMBER "44" at 2696.4,2078.36 h25 r270; PIN_NUMBER "28" at 2696.4,2235.84 h25 r270; PIN_NUMBER "39" at 3014.52,2117.73 h25 r270; PIN_NUMBER "46" at 2696.4,2058.69 h25 r270; PIN_NUMBER "78" at 2696.4,1743.72 h25 r270; PIN_NUMBER "66" at 2696.4,1861.83 h25 r270; PIN_NUMBER "63" at 3014.52,1881.51 h25 r270; PIN_NUMBER "69" at 3014.52,1822.47 h25 r270; PIN_NUMBER "26" at 2696.4,2255.54 h25 r270; PIN_NUMBER "25" at 3014.52,2255.54 h25 r270; PIN_NUMBER "17" at 3014.52,2334.28 h25 r270; PIN_NUMBER "18" at 2696.4,2334.28 h25 r270; PIN_NUMBER "12" at 2696.4,2393.32 h25 r270; PIN_NUMBER "6" at 2706.4,2452.38 h25 r270; PIN_NUMBER "11" at 3014.52,2393.32 h25 r270; PIN_NUMBER "57" at 3014.52,1940.58 h25 r270; PIN_NUMBER "47" at 3014.52,2038.99 h25 r270; PIN_NUMBER "60" at 2696.4,1920.88 h25 r270; PIN_NUMBER "74" at 2696.4,1783.1 h25 r270; PIN_NUMBER "71" at 3014.52,1802.78 h25 r270; PIN_NUMBER "20" at 2696.4,2314.58 h25 r270; PIN_NUMBER "13" at 3014.52,2373.64 h25 r270; PIN_NUMBER "19" at 3014.52,2314.58 h25 r270; PIN_NUMBER "9" at 3024.52,2413.01 h25 r270; PIN_NUMBER "4" at 2706.4,2472.06 h25 r270; PIN_NUMBER "3" at 3024.52,2472.06 h25 r270; PIN_NUMBER "35" at 3014.52,2157.1 h25 r270; PIN_NUMBER "36" at 2696.4,2157.1 h25 r270; PIN_NUMBER "33" at 3014.52,2176.79 h25 r270; PIN_NUMBER "7" at 3024.52,2432.69 h25 r270; PIN_NUMBER "34" at 2696.4,2176.79 h25 r270; PIN_NUMBER "72" at 2696.4,1802.78 h25 r270; PIN_NUMBER "15" at 3014.52,2353.95 h25 r270; PIN_NUMBER "38" at 2696.4,2137.42 h25 r270; PIN_NUMBER "31" at 3014.52,2196.47 h25 r270; PIN_NUMBER "37" at 3014.52,2137.42 h25 r270; PIN_NUMBER "32" at 2696.4,2196.47 h25 r270; PIN_NUMBER "14" at 2696.4,2373.64 h25 r270; PIN_NUMBER "29" at 3014.52,2216.17 h25 r270; PIN_NUMBER "68" at 2696.4,1842.15 h25 r270; PIN_NUMBER "30" at 2696.4,2216.17 h25 r270; PIN_NUMBER "10" at 2696.4,2413.01 h25 r270; PIN_NUMBER "8" at 2706.4,2432.69 h25 r270; PIN_NUMBER "16" at 2696.4,2353.95 h25 r270; PIN_NUMBER "49" at 3014.52,2019.31 h25 r270; PIN_NUMBER "24" at 2696.4,2275.21 h25 r270; PIN_NUMBER "40" at 2696.4,2117.73 h25 r270; PIN_NUMBER "51" at 3014.52,1999.62 h25 r270